# Altium PCB demo_dermis_chip1_package.PcbDoc (part 2 of 2)
Units mm, origin at the board's own origin, x right, y up, seen from the top; angles counter-clockwise.
Board outline 51.99 x 52.15 mm, 2 copper layers (Top Layer, Bottom Layer); 25 components, 82 nets, 198 pads, 241 vias.
Unrouted connection lines stored in the file: 1.
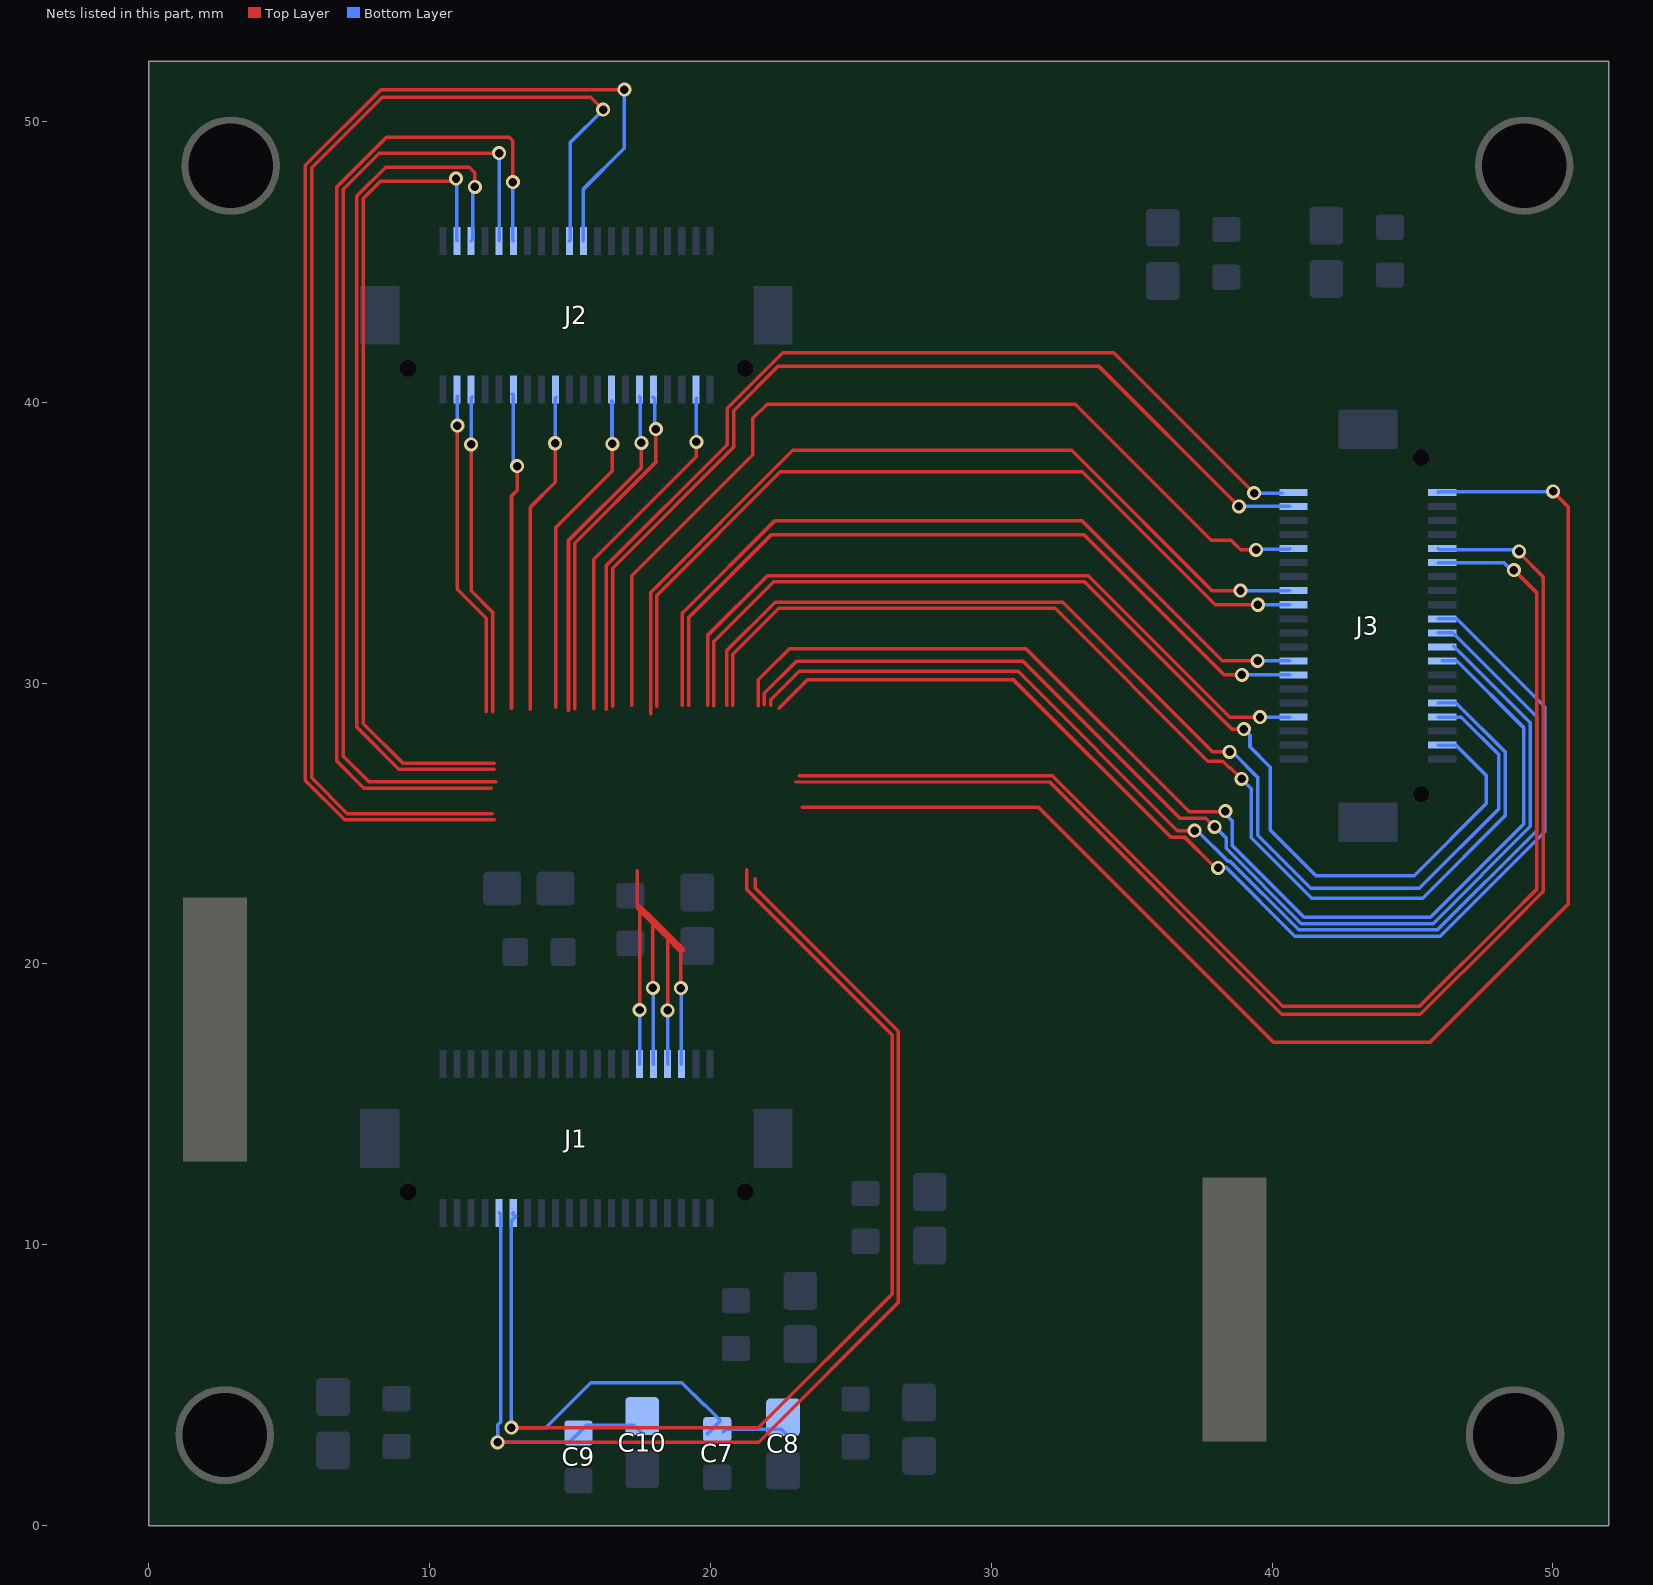
[diagram p2: the nets of this part, all layers, seen from the top]

## Via types
v1: diameter 0.85, hole 0.5, Top Layer to Bottom Layer, 141 vias
v2: diameter 0.5, hole 0.3, Top Layer to Bottom Layer, 100 vias

## Nets (pads, with @x,y where several pads share a name; then routed paths per layer and width w, separated by ;. In a path a pad name is that pad's centre, name@x,y a point inside that pad or via, vN(x,y) a via of type N, cw(c..) or ccw(c..) an arc to the next point about the centre after c; other vN are vias at no path point) (continued)
VINP_X0_3: J3.38 | length 40.8
  Top Layer w0.125: 20.122,29.199 20.122,31.492 ; 20.137,31.492 22.252,33.608 ; 22.252,33.607 33.322,33.607 38.562,28.367 v2(38.999,28.367)
  Bottom Layer w0.125: v2(38.999,28.367) 39.214,28.152 39.214,27.737 39.941,27.011 39.941,24.77 41.566,23.145 45.058,23.145 47.621,25.708 47.621,26.723 46.551,27.793 J3.38@45.923,27.793
VINP_X1: J2.37 | length 35.1
  Top Layer w0.125: 12.308,27.157 9.035,27.157 7.637,28.555 7.637,47.262 8.242,47.868 ; 8.242,47.868 v2@10.937,47.868 ; 8.242,47.868 v2@10.937,47.868 ; 8.242,47.868 v2@10.937,47.868
  Bottom Layer w0.125: v2(10.937,47.967) 10.957,47.947 10.957,45.774 J2.37@10.977,45.753
VINP_Y0: J2.30 | length 11.3
  Top Layer w0.125: 12.914,29.108 12.914,36.668 13.114,36.867 v2(13.114,37.73)
  Bottom Layer w0.125: J2.30@12.947,40.295 12.977,40.265 12.977,37.866 v2(13.114,37.73)
VINP_Y0_1: J2.4 | length 12.6
  Top Layer w0.125: 15.845,29.087 15.845,32.744 15.845,34.412 19.497,38.064 v2(19.497,38.593)
  Bottom Layer w0.125: v2(19.497,38.593) 19.487,38.603 19.487,40.115 J2.4@19.517,40.144
VINP_Y0_2: J3.9 | length 33.5
  Top Layer w0.125: 17.195,29.208 17.195,33.814 ; 17.2,33.823 21.512,38.135 21.512,39.43 22.021,39.938 32.986,39.938 37.828,35.096 38.536,35.096 38.693,34.938 38.884,34.748 v2(39.43,34.748)
  Bottom Layer w0.125: v2(39.43,34.748) 39.453,34.771 40.601,34.771 J3.9@40.623,34.793
VINP_Y0_3: J3.33 | length 26.2
  Top Layer w0.125: 19.897,29.211 19.897,31.697 22.032,33.833 24.53,33.833 33.46,33.833 38.5,28.793 v2(39.569,28.793) v2@39.53,28.833
  Bottom Layer w0.125: v2(39.569,28.793) J3.33@40.623,28.793
VINP_Y1: J2.35 | length 31.6
  Top Layer w0.125: v2(11.61,47.674) 11.61,48.173 11.404,48.38 8.436,48.38 7.412,47.356 7.412,28.425 8.905,26.932 12.295,26.932
  Bottom Layer w0.125: J2.35@11.478,45.753 11.54,45.816 11.54,47.603 v2(11.61,47.674)
VN_X0: J2.16 | length 11.8
  Top Layer w0.125: 14.492,29.135 14.492,35.546 16.51,37.565 v2(16.51,38.521)
  Bottom Layer w0.125: J2.16@16.48,40.054 16.494,40.04 16.494,38.537 v2(16.51,38.521)
VN_X0_2: J3.17 | length 30.2
  Top Layer w0.125: 18.095,29.172 18.095,33.128 ; 18.095,33.138 22.491,37.533 23.028,37.533 33.235,37.533 37.975,32.793 38.288,32.793 ; 38.312,32.793 v2(39.494,32.793)
  Bottom Layer w0.125: v2(39.494,32.793) J3.17@40.623,32.793
VN_X0_3: J3.32 | length 41.9
  Top Layer w0.125: 20.797,29.209 20.797,31.034 22.427,32.664 32.275,32.664 37.713,27.226 38.239,27.226 38.471,26.994 38.516,26.994 v2(38.916,26.594)
  Bottom Layer w0.125: v2(38.916,26.594) 39.265,26.245 39.265,24.491 41.418,22.339 45.361,22.339 48.296,25.274 48.296,25.429 48.296,27.555 46.548,29.303 45.933,29.303 J3.32@45.923,29.293
VN_X1: J2.19 | length 47.8
  Top Layer w0.125: 8.804,25.132 12.297,25.132 ; 8.901,25.132 6.978,25.132 5.573,26.537 5.573,48.443 8.27,51.141 v2(16.936,51.141)
  Bottom Layer w0.125: J2.19@15.477,45.753 15.477,47.598 16.936,49.057 v2(16.936,51.141)
VN_Y0: J2.38 | length 11.7
  Top Layer w0.125: v2(10.987,39.173) 10.987,33.347 12.015,32.319 12.015,28.98
  Bottom Layer w0.125: v2(10.987,39.173) 10.982,39.178 10.982,40.199 J2.38@11,40.216
VN_Y0_1: J2.12 | length 12.4
  Top Layer w0.125: 17.538,37.678 v2(17.538,38.561) ; 17.543,37.678 14.944,35.079 14.944,29.132 ; 14.944,29.132 14.944,29.035 14.944,29.132
  Bottom Layer w0.125: J2.12@17.473,40.204 17.508,40.169 17.508,38.591 v2(17.538,38.561)
VN_Y0_2: J3.1 | length 35.1
  Top Layer w0.125: 16.295,29.08 16.295,34.19 20.597,38.493 20.597,39.792 22.571,41.765 24.362,41.765 34.362,41.765 v2(39.362,36.765)
  Bottom Layer w0.125: v2(39.362,36.765) J3.1@40.355,36.765
VN_Y0_3: J3.25 | length 28.3
  Top Layer w0.125: 18.995,29.213 18.995,32.504 ; 19.009,32.504 22.299,35.793 24.484,35.793 33.223,35.793 38.223,30.793 v2(39.484,30.793)
  Bottom Layer w0.125: v2(39.484,30.793) J3.25@40.623,30.793
VN_Y1: J2.29 | length 37.2
  Top Layer w0.125: 9.681,26.257 12.193,26.257 ; 9.872,26.257 7.659,26.257 6.7,27.216 6.7,47.68 8.464,49.444 12.841,49.444 12.965,49.32 v2(12.965,47.843)
  Bottom Layer w0.125: v2(12.965,47.843) 12.965,45.766 J2.29@12.977,45.753
VOUT_COMP: J3.2 | length 51.8
  Top Layer w0.124: 23.26,25.581 31.682,25.581 40.042,17.221 45.636,17.221 50.557,22.141 50.557,36.264 50.013,36.808 v2(50.013,36.831)
  Bottom Layer w0.124: J3.2@45.923,36.793 45.942,36.812 49.994,36.812 v2(50.013,36.831)
VOUTN_OTA: J3.10 | length 47.2
  Top Layer w0.124: 23.042,26.482 32.08,26.482 40.349,18.212 45.275,18.212 45.283,18.204 48.247,21.167 48.561,21.482 49.593,22.513
  Top Layer w0.125: v2(48.8,34.695) 48.8,34.639 49.659,33.78 49.659,22.579 49.593,22.513
  Bottom Layer w0.125: J3.10@45.923,34.793 45.972,34.744 48.751,34.744 v2(48.8,34.695)
VOUTN_X0: J3.24 | length 41.1
  Top Layer w0.125: 21.922,29.225 21.922,29.647 23.049,30.774 31.142,30.774 36.722,25.194 37.643,25.194 v2(37.953,24.885)
  Bottom Layer w0.125: v2@38.111,24.843 38.111,24.741 38.366,24.486 38.366,24.118 41.045,21.439 45.734,21.439 49.196,24.901 49.196,28.596 J3.24@46.477,31.315
VOUTN_Y0: J3.20 | length 42.5
  Top Layer w0.125: 22.45,29.115 23.45,30.115 30.792,30.115 36.386,24.521 36.883,24.521 37.979,23.425 v2(38.078,23.425)
  Bottom Layer w0.125: v2@38.141,23.441 38.359,23.441 40.811,20.989 45.986,20.989 49.709,24.712 49.709,29.16 46.576,32.293 J3.20@46.062,32.293 J3.20@45.923,32.293
VOUTP_OTA: J3.12 | length 45.9
  Top Layer w0.125: 23.166,26.707 23.291,26.707 32.172,26.707 40.38,18.499 45.253,18.499 48.461,21.707 48.468,21.707 49.434,22.672 49.434,33.211 v2@48.616,34.029
  Bottom Layer w0.125: J3.12@45.923,34.293 45.927,34.298 48.246,34.298 48.52,34.024 v2(48.611,34.024)
VOUTP_X0: J3.26 | length 41.9
  Top Layer w0.125: 21.697,29.204 21.697,30.116 22.024,30.443 22.813,31.232 31.235,31.232 37.048,25.419 38.312,25.419 v2(38.336,25.443)
  Bottom Layer w0.125: v2(38.336,25.443) 38.336,25.342 38.591,25.087 38.591,24.211 41.138,21.664 45.641,21.664 48.971,24.994 48.971,28.404 46.582,30.793 J3.26@46.062,30.793
VOUTP_Y0: J3.22 | length 42
  Top Layer w0.125: 22.147,29.211 22.147,29.409 22.29,29.552 23.157,30.419 30.956,30.419 36.629,24.746 v2(37.241,24.746)
  Bottom Layer w0.125: v2(37.241,24.746) 37.34,24.746 38.42,23.666 38.499,23.666 40.952,21.214 45.893,21.214 49.421,24.742 49.421,28.809 46.437,31.793 J3.22@46.062,31.793 J3.22@45.923,31.793
VP_X0: J2.24 | length 11.5
  Top Layer w0.125: 13.59,29.072 13.59,36.274 14.467,37.152 v2(14.467,38.546)
  Bottom Layer w0.125: v2(14.467,38.546) 14.473,38.55 14.473,40.152 J2.24@14.511,40.19
VP_X0_2: J3.15 | length 31.2
  Top Layer w0.125: 17.87,28.916 17.87,33.231 22.933,38.293 23.876,38.293 32.863,38.293 37.863,33.293 v2(38.876,33.293)
  Bottom Layer w0.125: v2(38.876,33.293) J3.15@40.623,33.293
VP_X0_3: J3.34 | length 41.4
  Top Layer w0.125: 20.572,29.208 20.572,31.149 22.312,32.889 32.548,32.889 37.88,27.557 v2(38.492,27.557)
  Bottom Layer w0.125: v2(38.492,27.557) 38.577,27.557 39.491,26.643 39.491,24.584 41.38,22.695 45.244,22.695 48.071,25.522 48.071,27.462 46.74,28.793 J3.34@46.062,28.793 J3.34@45.923,28.793
VP_X1: J2.21 | length 45.5
  Top Layer w0.125: 12.233,25.357 7.071,25.357 5.798,26.63 5.798,48.35 8.315,50.867 15.734,50.867 v2(16.176,50.426)
  Bottom Layer w0.125: J2.21@14.977,45.753 15.004,45.78 15.004,49.253 v2(16.176,50.426)
VP_Y0: J2.36 | length 11.5
  Top Layer w0.125: v2(11.475,38.507) 11.475,33.298 12.24,32.533 12.24,28.98
  Bottom Layer w0.125: v2(11.475,38.507) 11.476,38.508 11.476,40.156 J2.36@11.515,40.196
VP_Y0_1: J2.10 | length 12.3
  Top Layer w0.125: 15.169,29.089 15.169,33.596 15.169,34.986 18.061,37.877 ; 18.055,37.877 v2(18.055,39.045)
  Bottom Layer w0.125: J2.10@17.953,40.19 18.017,40.126 18.017,39.084 v2(18.055,39.045)
VP_Y0_2: J3.3 | length 34.8
  Top Layer w0.125: 16.52,29.187 16.52,34.097 20.822,38.399 20.822,38.718 20.829,38.725 20.829,39.706 22.419,41.296 23.817,41.296 33.817,41.296 v2(38.817,36.296)
  Bottom Layer w0.125: v2(38.817,36.296) 38.818,36.295 40.622,36.295 J3.3@40.623,36.293
VP_Y0_3: J3.27 | length 27.8
  Top Layer w0.125: 19.22,29.208 19.22,32.352 ; 19.235,32.352 22.176,35.293 23.925,35.293 33.296,35.293 38.296,30.293 v2(38.925,30.293)
  Bottom Layer w0.125: v2(38.925,30.293) J3.27@40.623,30.293
VP_Y1: J2.31 | length 35.2
  Top Layer w0.125: 12.352,26.482 7.843,26.482 6.925,27.4 6.925,47.587 8.208,48.87 v2@12.475,48.87
  Bottom Layer w0.125: v2(12.475,48.879) 12.476,48.877 12.476,45.755 J2.31@12.477,45.753
VSS: J1.5 J1.7 J1.9 J1.11 | length 26.6
  Top Layer w0.125: 17.389,22.068 17.389,23.318 ; 17.4,22.068 17.477,21.991 v2(17.477,18.36) ; v2(17.947,19.153) 17.947,21.52 ; v2(18.478,18.347) 18.478,20.99 ; v2(18.948,19.14) 18.948,20.494
  Top Layer w0.25: 17.477,21.991 17.947,21.52 18.478,20.99 18.961,20.507
  Bottom Layer w0.125: J1.11@17.477,16.434 v2(17.477,18.36) ; v2(17.947,19.153) 17.962,19.138 17.962,16.449 J1.9@17.977,16.434 ; J1.5@18.963,16.436 v2@18.963,19.125 ; J1.7@18.478,16.421 v2(18.478,18.347) ; J1.7@18.478,16.421 v2(18.478,18.347) ; J1.7@18.478,16.421 v2(18.478,18.347)
VTRIG_COMP: C7.1 C8.1 J1.30 | length 53.6
  Top Layer w0.125: v2(12.907,3.486) 12.909,3.484 21.706,3.484 26.466,8.244 26.466,17.481 21.284,22.663 ; 21.289,22.663 21.289,23.362
  Bottom Layer w0.125: J1.30@12.977,11.134 12.958,11.115 13.065,11.008 12.907,10.849 v2(12.907,3.486) 12.909,3.484 14.131,3.484 15.733,5.087 18.982,5.087 19.786,4.284 19.813,4.284 20.344,3.753 C7.1@20.344,3.725 ; C7.1@20.463,3.35 20.527,3.384 20.63,3.439 22.51,3.439 22.608,3.341 C8.1@22.744,3.205 ; C7.1@19.882,3.263 C7.1@20.344,3.725 ; C7.1@19.882,3.263 C7.1@20.344,3.725 ; C7.1@19.882,3.263 C7.1@20.344,3.725
VTUNE_PSEUDO: C9.1 C10.1 J1.32 | length 47.3
  Top Layer w0.125: v2(12.424,2.967) 21.715,2.967 26.691,7.943 26.691,17.602 21.589,22.704 21.589,23.029
  Bottom Layer w0.125: J1.32@12.477,11.134 12.539,11.072 12.539,3.702 12.424,3.587 v2(12.424,2.967) 14.972,2.967 C9.1@15.303,3.298 15.584,3.579 17.272,3.579 C10.1@17.567,3.284
pads on no net: C1.0 C2.0 C3.0 C4.0 C5.0 C6.0 C7.0 C8.0 C9.0 C10.0 C11.0 C12.0 C13.0 C14.0 C15.0 C16.0 C17.0 C18.0 C19.0 C20.0 J1. J2. J3.

## Polygon pours and split planes (outlines as drawn)
GND on Top Layer "Top Layer-GND" (solid, remove dead copper, pour order 40): 0.398,51.751 51.188,51.751 51.188,0.612 0.586,0.613 0.586,51.752
VCM on Top Layer "Top Layer-VCM" (solid, remove dead copper, pour order 38): 25.814,24.253 30.078,19.989 51.126,19.989 51.126,51.685 0.423,51.685 0.411,51.104 0.411,24.253
GND on Bottom Layer "Bottom Layer-GND" (solid, remove dead copper, pour order 42): 0.388,51.68 0.46,51.751 51.209,51.751 51.209,0.439 0.587,0.44
VCM on Bottom Layer "Bottom Layer-VCM" (solid, remove dead copper, pour order 36): 25.814,24.36 30.051,20.123 51.098,20.123 51.225,19.996 51.225,24.36 51.236,24.36 51.236,51.679 0.388,51.68 0.487,24.36

## Keep-outs
Keep-Out Layer:
  region: 12.751,28.581 22.663,28.581 22.663,23.628 12.751,23.628

## Other copper
Top Layer:
  rectangle net VINN_OTA: 22.817,27.094 23.316,27.219
  rectangle net VDD_COMP: 22.817,26.194 23.316,26.319
  region net VCM: 21.084,28.685 21.084,29.186 20.959,29.186 20.959,28.685
  rectangle net VDD_OTA: 22.817,27.319 23.316,27.444
  rectangle net VINP_Y1: 12.135,26.869 12.635,26.995
  region net VINP_X0_3: 20.183,28.685 20.183,29.186 20.058,29.186 20.058,28.685
  region net VCM: 18.382,28.686 18.382,29.186 18.257,29.186 18.257,28.686
  region net VINP_Y0_2: 17.258,28.694 17.258,29.195 17.133,29.195 17.133,28.694
  region net VDD_DIG_6V: 17.752,23.009 17.752,23.509 17.627,23.509 17.627,23.009
  region net VDD_IO_3P3V: 17.152,23.008 17.152,23.508 17.027,23.508 17.027,23.008
  region net AGND: 18.351,23.009 18.351,23.508 18.226,23.508 18.226,23.009
  region net STATE_OUT: 18.651,23.008 18.651,23.508 18.526,23.508 18.526,23.008
  region net SER_IN: 19.251,23.009 19.251,23.509 19.126,23.509 19.126,23.009
  region net SER_CLK: 18.951,23.009 18.951,23.509 18.826,23.509 18.826,23.009
  region net VDD_TAXEL_3V: 20.151,23.01 20.151,23.51 20.026,23.51 20.026,23.01
  region net IBIAS_SLEW: 20.451,23.01 20.451,23.51 20.326,23.51 20.326,23.01
  region net SER_EN: 19.851,23.009 19.851,23.509 19.726,23.509 19.726,23.009
  region net SER_OUT: 19.551,23.009 19.551,23.509 19.426,23.509 19.426,23.009
  region net VCM: 21.951,23.011 21.951,23.511 21.826,23.511 21.826,23.011
  region net VTRIG_COMP: 21.351,23.011 21.351,23.511 21.226,23.511 21.226,23.011
  region net VTUNE_PSEUDO: 21.651,23.011 21.651,23.511 21.526,23.511 21.526,23.011
  region net IBIAS_ADAPT: 21.051,23.01 21.051,23.51 20.926,23.51 20.926,23.01
  region net IBIAS_AFE: 20.751,23.01 20.751,23.51 20.626,23.51 20.626,23.01
  region net RATIOMODE0: 15.952,23.007 15.952,23.507 15.827,23.507 15.827,23.007
  region net RATIOMODE1: 16.252,23.006 16.252,23.506 16.127,23.506 16.127,23.006
  region net CLK: 16.852,23.007 16.852,23.507 16.727,23.507 16.727,23.007
  region net CT_MODE: 16.552,23.008 16.552,23.508 16.427,23.508 16.427,23.008
  region net VDD_DIG_3V: 18.052,23.008 18.052,23.508 17.927,23.508 17.927,23.008
  region net VSS: 17.452,23.007 17.452,23.507 17.327,23.507 17.327,23.007
  region net ADDRX0: 14.752,23.006 14.752,23.506 14.627,23.506 14.627,23.006
  region net ADDRX1: 15.052,23.006 15.052,23.505 14.927,23.505 14.927,23.006
  region net ADDRY0: 15.652,23.007 15.652,23.507 15.527,23.507 15.527,23.007
  region net ADDRX2: 15.352,23.007 15.352,23.507 15.227,23.507 15.227,23.007
  region net REQON: 14.152,23.006 14.152,23.506 14.027,23.506 14.027,23.006
  region net REQOFF: 14.452,23.006 14.452,23.506 14.327,23.506 14.327,23.006
  region net ACK: 13.852,23.005 13.852,23.505 13.727,23.505 13.727,23.005
  rectangle net GAIN_HI: 22.817,25.294 23.316,25.419
  rectangle net VOUT_COMP: 22.817,25.519 23.316,25.644
  rectangle net VOUTN_OTA: 22.817,26.419 23.316,26.544
  rectangle net VOUTP_OTA: 22.817,26.644 23.316,26.769
  rectangle net VINP_OTA: 22.817,26.869 23.316,26.994
  rectangle net VINP_COMP: 22.817,25.744 23.316,25.869
  rectangle net VINN_COMP: 22.817,25.969 23.316,26.094
  rectangle net SPKGATE: 22.817,25.069 23.316,25.194
  rectangle net AER_DIS: 22.817,24.844 23.316,24.969
  region net VCM: 21.534,28.686 21.534,29.186 21.408,29.186 21.408,28.686
  region net VN_X0_3: 20.859,28.685 20.859,29.186 20.734,29.186 20.734,28.685
  region net VP_X0_3: 20.634,28.686 20.634,29.185 20.508,29.185 20.508,28.686
  region net VINN_X0_3: 21.309,28.685 21.309,29.186 21.184,29.186 21.184,28.685
  region net VCM: 20.409,28.686 20.409,29.185 20.284,29.185 20.284,28.686
  region net VOUTP_Y0: 22.209,28.685 22.209,29.185 22.084,29.185 22.084,28.685
  region net VOUTN_X0: 21.984,28.685 21.984,29.185 21.859,29.185 21.859,28.685
  region net VOUTN_Y0: 22.434,28.685 22.434,29.185 22.309,29.185 22.309,28.685
  region net VOUTP_X0: 21.759,28.685 21.759,29.185 21.634,29.185 21.634,28.685
  region net VCM: 17.707,28.686 17.707,29.186 17.582,29.186 17.582,28.686
  region net VINN_X0_2: 18.607,28.686 18.607,29.186 18.482,29.186 18.482,28.686
  region net VP_X0_2: 17.932,28.686 17.932,29.186 17.807,29.186 17.807,28.686
  region net VN_X0_2: 18.157,28.686 18.157,29.186 18.032,29.186 18.032,28.686
  region net VCM: 18.833,28.686 18.833,29.186 18.708,29.186 18.708,28.686
  region net VCM: 19.508,28.685 19.508,29.186 19.383,29.186 19.383,28.685
  region net VP_Y0_3: 19.283,28.686 19.283,29.185 19.158,29.185 19.158,28.686
  region net VINN_Y0_3: 19.733,28.685 19.733,29.186 19.608,29.186 19.608,28.685
  region net VINP_Y0_3: 19.958,28.685 19.958,29.186 19.833,29.186 19.833,28.685
  region net VN_Y0_3: 19.058,28.686 19.058,29.185 18.933,29.185 18.933,28.686
  region net VN_Y0_2: 16.358,28.695 16.358,29.194 16.233,29.194 16.233,28.695
  region net VINN_Y0_2: 17.033,28.694 17.033,29.195 16.908,29.195 16.908,28.694
  region net VP_Y0_2: 16.583,28.695 16.583,29.194 16.458,29.194 16.458,28.695
  region net VCM: 16.808,28.694 16.808,29.195 16.683,29.195 16.683,28.694
  region net VINP_X0_2: 17.483,28.694 17.483,29.195 17.357,29.195 17.357,28.694
  region net VN_X0: 14.554,28.695 14.554,29.195 14.429,29.195 14.429,28.695
  rectangle net VP_Y1: 12.133,26.419 12.633,26.544
  rectangle net VINP_X1: 12.135,27.094 12.635,27.22
  region net VCM: 16.132,28.695 16.132,29.195 16.007,29.195 16.007,28.695
  region net VP_X0: 13.653,28.695 13.653,29.195 13.527,29.195 13.527,28.695
  rectangle net VN_Y1: 12.135,26.195 12.635,26.32
  region net VCM: 15.457,28.695 15.457,29.195 15.332,29.195 15.332,28.695
  region net VP_Y0_1: 15.232,28.695 15.232,29.195 15.107,29.195 15.107,28.695
  region net VINN_Y0_1: 15.682,28.695 15.682,29.195 15.557,29.195 15.557,28.695
  region net VINP_Y0_1: 15.907,28.695 15.907,29.195 15.782,29.195 15.782,28.695
  region net VN_Y0_1: 15.007,28.695 15.007,29.195 14.882,29.195 14.882,28.695
  region net VN_Y0: 12.077,28.695 12.077,29.195 11.952,29.195 11.952,28.695
  region net VINP_X0: 13.202,28.695 13.202,29.195 13.077,29.195 13.077,28.695
  region net VINP_Y0: 12.977,28.695 12.977,29.195 12.852,29.195 12.852,28.695
  region net VINN_Y0: 12.752,28.695 12.752,29.195 12.627,29.195 12.627,28.695
  region net VINN_X0: 14.103,28.695 14.103,29.195 13.978,29.195 13.978,28.695
  region net VP_Y0: 12.302,28.695 12.302,29.195 12.177,29.195 12.177,28.695
  region net RST: 13.553,23.005 13.553,23.505 13.427,23.505 13.427,23.005
  rectangle net VINN_X1: 12.135,27.32 12.635,27.444
  rectangle net VP_X1: 12.135,25.294 12.635,25.419
  rectangle net VINN_Y1: 12.135,25.745 12.635,25.869
  rectangle net VN_X1: 12.135,25.069 12.635,25.194
  region net GND: 12.741,28.502

## Silkscreen, mask and mechanical layers (free items; w line width, h text height)
Top Overlay:
  drawing of 4707 lines, arcs and shapes, not listed
  text "VCM" at 48.39,45.032 h0.5
  text "VCM" at 2.003,44.849 h0.5
  text "DERMIS" at 8.815,42.858 h4 r0.15
  text "DEMO" at 16.7,41.255 h2
  text "mark.alea@kuleuven.be" at 43.959,36.714 h0.5 r270.14
  text "georges.gielen@kuleuven.be" at 42.273,36.681 h0.5 r270.18
  text "maria.rosa@kuleuven.be" at 43.06,36.661 h0.5 r270.18
  text "*" at 10.47,29.509 h2
  text "Pragmatic Chip (DEMO version): March '25  PCB: June '25" at 2.531,6.372 h0.5 r359.52
  text "GND" at 47.98,0.441 h0.5
  text "GND" at 1.314,0.379 h0.5
Bottom Overlay:
  lines w0.5: 33.889,43.292 36.185,40.996 45.124,40.996 46.272,42.144 46.272,49.565 44.468,51.369 34.873,51.369 33.889,50.385 33.889,43.292
  text "VDD_COMP" at 40.023,47.492 h0.5 r90
  text "VDD_OTA" at 45.929,47.207 h0.5 r90
  text "!! DO NOT INSERT / FOR PSRR TESTS!!" at 43.536,41.64 h0.5
Top Solder:
  region: 20.751,23.01 20.751,23.51 20.626,23.51 20.626,23.01
  region: 18.651,23.008 18.651,23.508 18.526,23.508 18.526,23.008
  region: 21.051,23.01 21.051,23.51 20.926,23.51 20.926,23.01
  region: 21.651,23.011 21.651,23.511 21.526,23.511 21.526,23.011
  region: 21.351,23.011 21.351,23.511 21.226,23.511 21.226,23.011
  region: 21.951,23.011 21.951,23.511 21.826,23.511 21.826,23.011
  region: 19.551,23.01 19.551,23.51 19.426,23.51 19.426,23.01
  region: 19.851,23.009 19.851,23.509 19.726,23.509 19.726,23.009
  region: 20.451,23.01 20.451,23.51 20.326,23.51 20.326,23.01
  region: 20.151,23.01 20.151,23.51 20.026,23.51 20.026,23.01
  region: 18.951,23.01 18.951,23.51 18.826,23.51 18.826,23.01
  region: 19.251,23.009 19.251,23.509 19.126,23.509 19.126,23.009
  region: 17.152,23.008 17.152,23.508 17.027,23.508 17.027,23.008
  region: 17.452,23.007 17.452,23.507 17.327,23.507 17.327,23.007
  region: 18.052,23.008 18.052,23.508 17.927,23.508 17.927,23.008
  region: 17.752,23.009 17.752,23.509 17.627,23.509 17.627,23.009
  region: 16.852,23.007 16.852,23.507 16.727,23.507 16.727,23.007
  region: 18.351,23.009 18.351,23.509 18.226,23.509 18.226,23.009
  region: 15.352,23.007 15.352,23.507 15.227,23.507 15.227,23.007
  region: 15.652,23.007 15.652,23.507 15.527,23.507 15.527,23.007
  region: 15.052,23.006 15.052,23.506 14.927,23.506 14.927,23.006
  region: 14.752,23.006 14.752,23.506 14.627,23.506 14.627,23.006
  region: 16.552,23.008 16.552,23.508 16.427,23.508 16.427,23.008
  region: 16.252,23.006 16.252,23.506 16.127,23.506 16.127,23.006
  region: 15.952,23.007 15.952,23.507 15.827,23.507 15.827,23.007
  region: 13.553,23.005 13.553,23.505 13.427,23.505 13.427,23.005
  region: 13.852,23.005 13.852,23.505 13.727,23.505 13.727,23.005
  region: 14.452,23.006 14.452,23.506 14.327,23.506 14.327,23.006
  region: 14.152,23.006 14.152,23.506 14.027,23.506 14.027,23.006
  region: 22.322,29.185 22.322,28.686 22.447,28.686 22.447,29.185
  region: 22.097,29.185 22.097,28.685 22.222,28.685 22.222,29.185
  region: 21.872,29.185 21.872,28.685 21.997,28.685 21.997,29.185
  region: 21.197,29.185 21.197,28.686 21.322,28.686 21.322,29.185
  region: 21.647,29.185 21.647,28.685 21.772,28.685 21.772,29.185
  region: 20.522,29.185 20.522,28.686 20.647,28.686 20.647,29.185
  region: 20.747,29.185 20.747,28.686 20.872,28.686 20.872,29.185
  region: 19.847,29.185 19.847,28.685 19.972,28.685 19.972,29.185
  region: 20.072,29.185 20.072,28.685 20.197,28.685 20.197,29.185
  region: 19.622,29.185 19.622,28.686 19.747,28.686 19.747,29.185
  region: 16.246,29.185 16.246,28.685 16.371,28.685 16.371,29.185
  region: 16.472,29.185 16.472,28.685 16.597,28.685 16.597,29.185
  region: 17.371,29.185 17.371,28.685 17.497,28.685 17.497,29.185
  region: 17.147,29.185 17.147,28.685 17.272,28.685 17.272,29.185
  region: 18.046,29.185 18.046,28.685 18.171,28.685 18.171,29.185
  region: 17.821,29.185 17.821,28.685 17.946,28.685 17.946,29.185
  region: 18.497,29.185 18.497,28.685 18.622,28.685 18.622,29.185
  region: 18.947,29.185 18.947,28.685 19.071,28.685 19.071,29.185
  region: 19.171,29.185 19.171,28.685 19.297,28.685 19.297,29.185
  region: 16.922,29.185 16.922,28.685 17.047,28.685 17.047,29.185
  region: 13.202,28.695 13.202,29.195 13.077,29.195 13.077,28.695
  rectangle: 12.135,26.195 12.635,26.32
  rectangle: 12.135,25.069 12.635,25.194
  rectangle: 12.135,27.32 12.635,27.444
  rectangle: 12.135,25.745 12.635,25.87
  rectangle: 12.135,25.294 12.635,25.419
  rectangle: 12.135,27.095 12.635,27.22
  rectangle: 12.135,26.869 12.635,26.995
  rectangle: 12.135,26.42 12.635,26.545
  rectangle: 22.818,25.519 23.318,25.644
  rectangle: 22.818,27.319 23.318,27.444
  rectangle: 22.818,27.094 23.318,27.219
  rectangle: 22.818,26.194 23.318,26.319
  rectangle: 22.818,26.419 23.318,26.544
  rectangle: 22.818,26.644 23.318,26.769
  rectangle: 22.818,26.869 23.318,26.994
  rectangle: 22.818,25.744 23.318,25.869
  rectangle: 22.818,25.969 23.318,26.094
  rectangle: 22.818,25.069 23.318,25.194
  rectangle: 22.818,25.294 23.318,25.419
  rectangle: 22.818,24.844 23.318,24.969
  region: 12.302,28.695 12.302,29.195 12.177,29.195 12.177,28.695
  region: 15.002,28.695 15.002,29.195 14.877,29.195 14.877,28.695
  region: 15.902,28.695 15.902,29.195 15.777,29.195 15.777,28.695
  region: 15.677,28.695 15.677,29.195 15.552,29.195 15.552,28.695
  region: 15.227,28.695 15.227,29.195 15.102,29.195 15.102,28.695
  region: 14.102,28.695 14.102,29.195 13.977,29.195 13.977,28.695
  region: 14.552,28.695 14.552,29.195 14.427,29.195 14.427,28.695
  region: 12.752,28.695 12.752,29.195 12.627,29.195 12.627,28.695
  region: 12.977,28.695 12.977,29.195 12.852,29.195 12.852,28.695
  region: 13.202,28.695 13.202,29.195 13.077,29.195 13.077,28.695
  region: 13.652,28.695 13.652,29.195 13.527,29.195 13.527,28.695
  region: 12.077,28.695 12.077,29.195 11.952,29.195 11.952,28.695
Mechanical 14:
  region: 23.822,22.434
  region: 21.742,22.582
  region: 7.451,34.62
  region: 5.371,34.769